# Altium PCB smart_lock.PcbDoc
Units mm, origin at the board's own origin, x right, y up, seen from the top; angles counter-clockwise.
Board outline 152.4 x 101.6 mm, 2 copper layers (Top Layer, Bottom Layer); 9 components, 14 nets, 105 pads, 0 vias.
Unrouted connection lines stored in the file: 1.
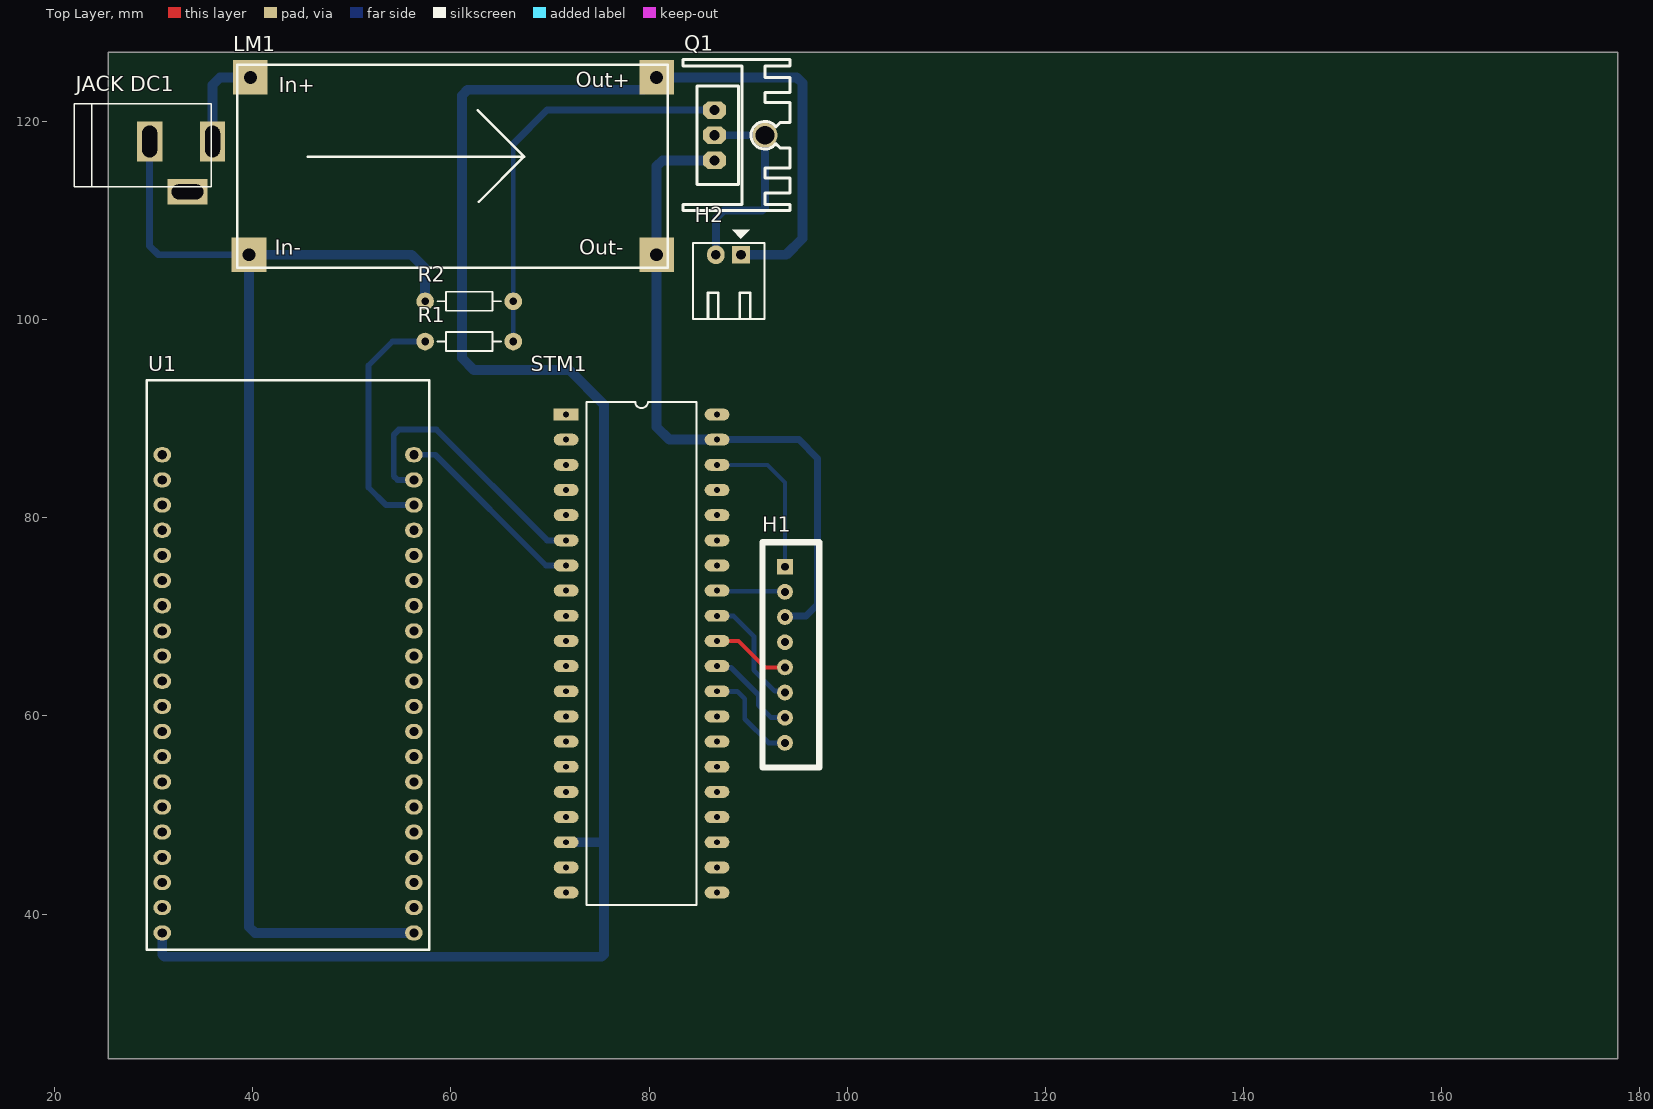
[diagram p0: Top Layer view]
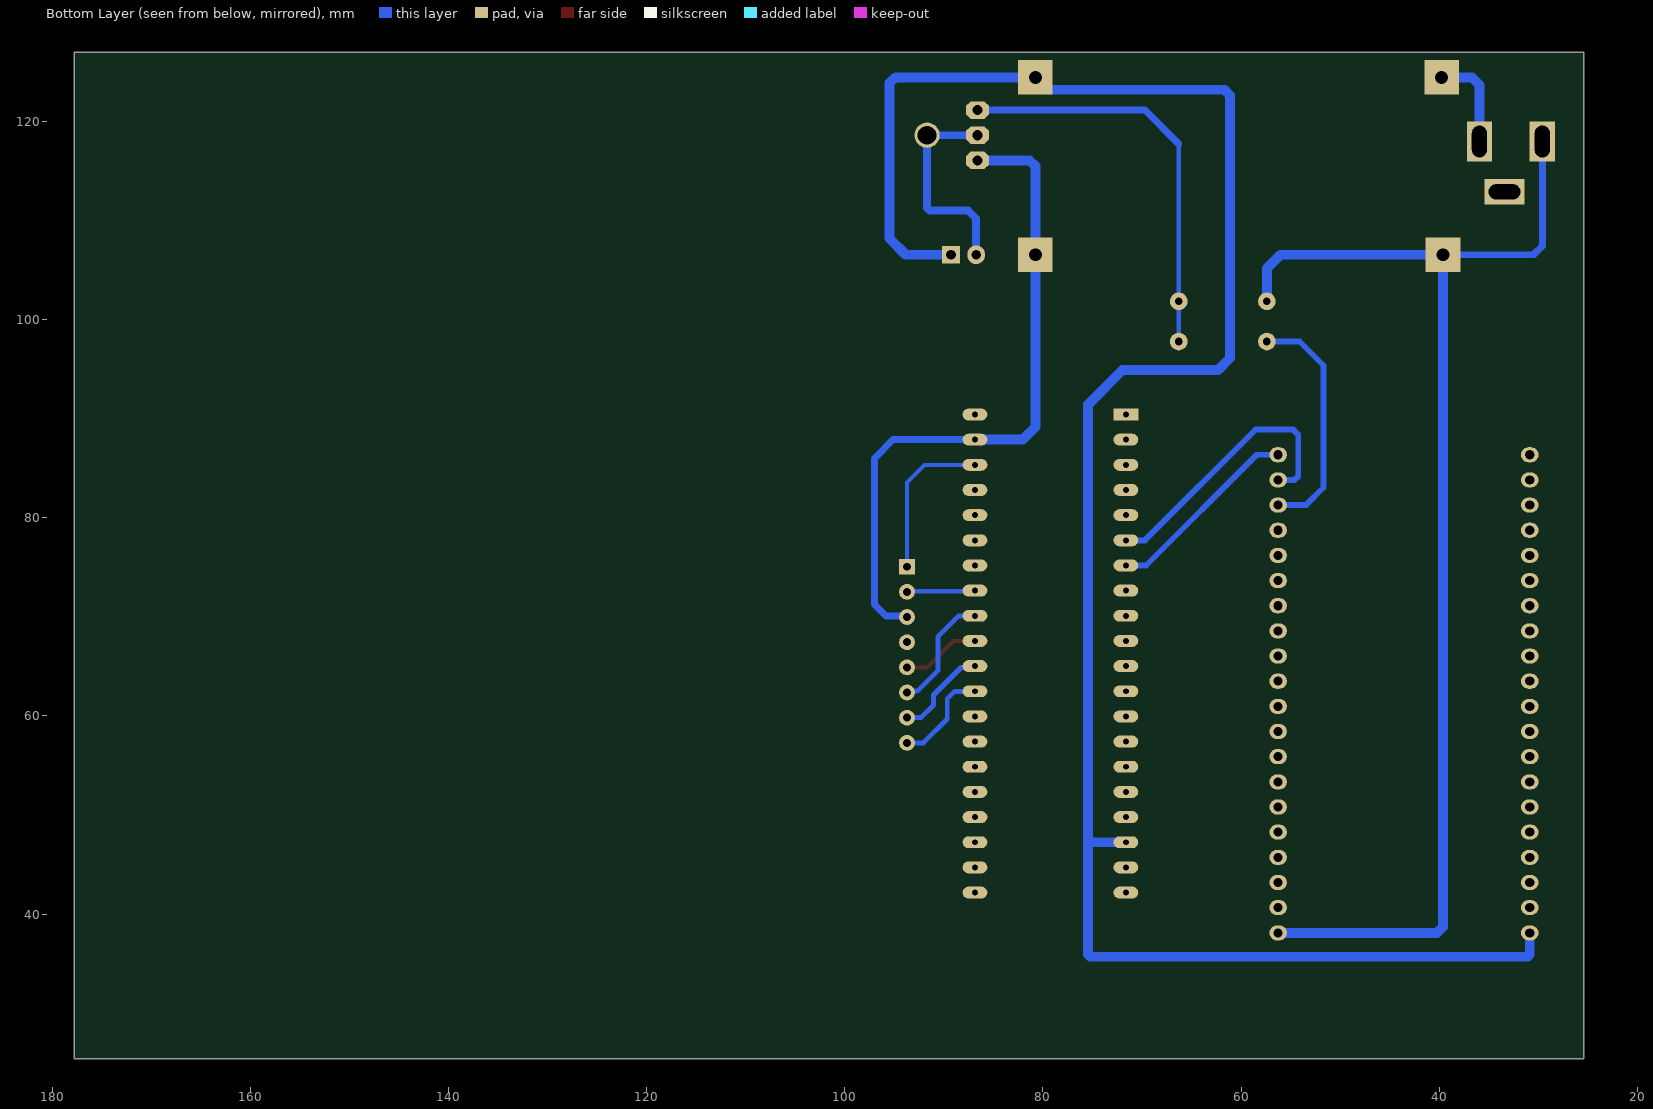
[diagram p1: Bottom Layer view, seen from below]
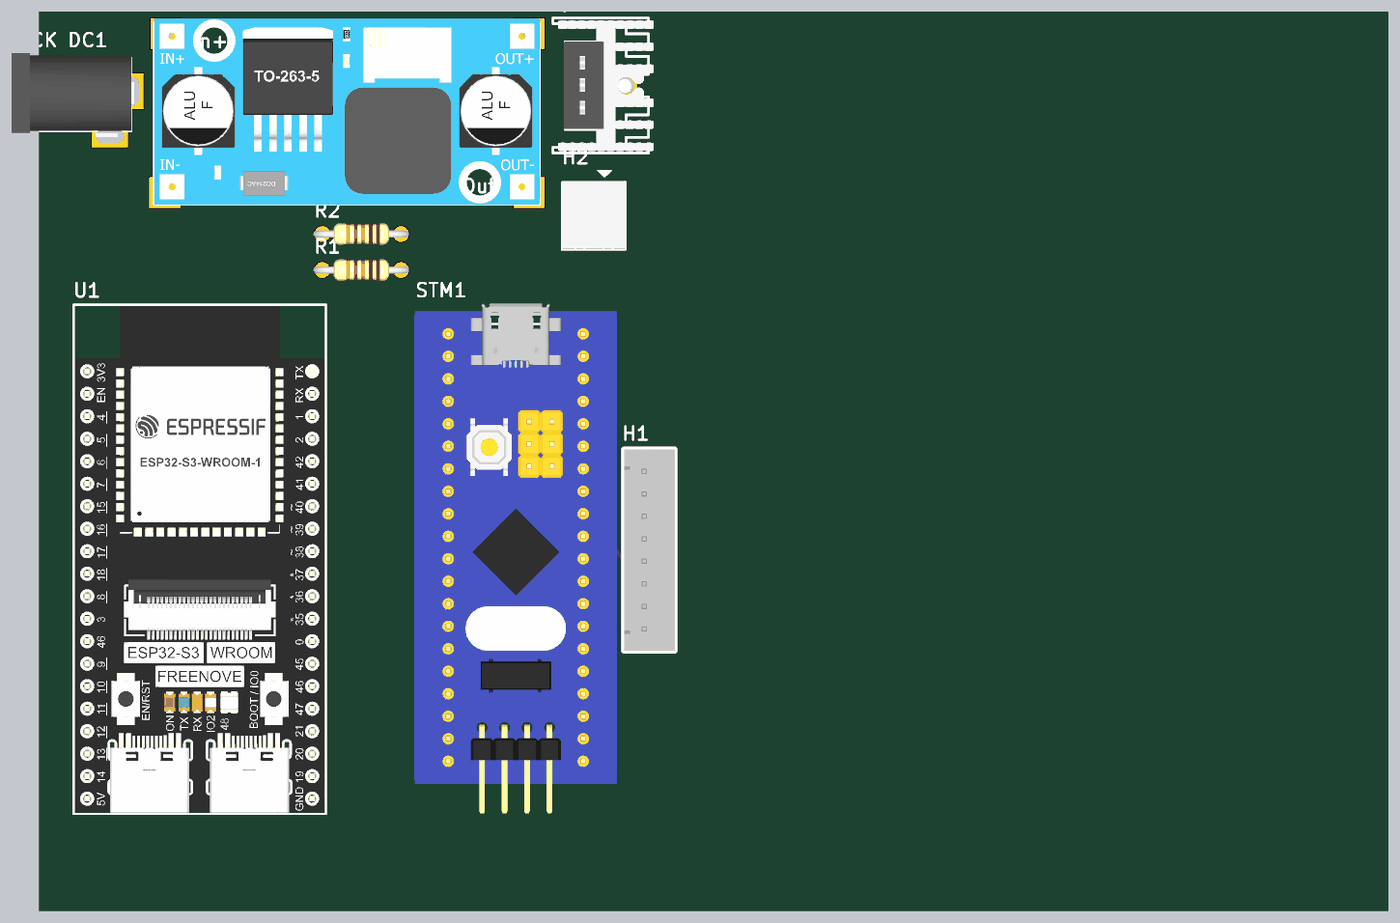
[diagram p2: 3D render of the assembled board from above, using the file's embedded part models]

## Layer stack, top to bottom
Top Solder: solder mask 0.0102, Solder Resist, Dk 3.5
Top Layer: signal copper 0.0356
Dielectric 1: dielectric 0.32, FR-4, Dk 4.8
Bottom Layer: signal copper 0.0356
Bottom Solder: solder mask 0.0102, Solder Resist, Dk 3.5

## Board outline
25.4,25.4 177.8,25.4 177.8,127 25.4,127

## Design rules (kind name [scope] priority, off if disabled: settings)
Clearance [All] p1: gap=0.4 ignorepadtopadclearanceinfootprint=FALSE
PolygonConnect [All] p1: connectstyle=Relief reliefconductorwidth=0.254 reliefentries=4 polygonreliefangle="90 Angle" airgapwidth=0.254
RoutingVias [All] p1: holewidth=0.711 width=1.27 viastyle="Through Hole" minholewidth=0.711 minwidth=1.27 maxholewidth=0.711 maxwidth=1.27
SolderMaskExpansion [All] p1: expansion=0.102 istentingtop=FALSE
SupplyNets "Schematic Supply Nets" [InNet('GND')] p1: voltage=0.000
Width [All] p1: maxlimit=1 minlimit=0.254 preferedwidth=0.5
30 further rules are at their usual default settings.

## Components (designator, comment, footprint, x,y, rotation, side; value= is the part's Value field where it differs from the comment)
H1 "Header 8P 2.54 Duc Thang" XH2.54M-8 93.726,75.057 r270 top
H2 "Header 2P 2.54 Duc Cong" "Header 2P DC 2.54" 89.281,106.553 r270 top
"JACK DC1" "JACK DC 5.5" "JACK DC 5.5" 32.766,115.443 r0 top value="Jac DC"
LM1 "LM2596-Adj" lm2596 56.261,113.411 r0 top
Q1 "IRFZ44" QTO-220H3 86.614,121.158 r270 top
R1 "100" R1/4W 57.404,97.79 r0 top value="R1/4W - 1K"
R2 "10K" R1/4W 57.404,101.854 r0 top value="R1/4W - 1K"
STM1 "KIT STM32F103C8T6" "STM32F103 KIT" 71.628,90.424 r0 top
U1 "ESP32-S3-CAM" ESP32-S3-CAM 30.861,58.42 r0 top

## Footprints (in the part's own frame and the unit in brackets; to place one, negate y for a bottom-side part, rotate by r counter-clockwise, add the part's x,y. Pads: shape width x height; smd on the part's side, far side on the other; paste and mask are expansions set on the pad)
ESP32-S3-CAM [mil] "ESP32-S3-CAM"
  oval 70x60 hole 36: 1(0,1100) 2(0,1000) 3(0,900) 4(0,800) 5(0,700) 6(0,600) 7(0,500) 8(0,400) 9(0,300) 10(0,200) 11(0,100) 12(0,0) 13(0,-100) 14(0,-200) 15(0,-300) 16(0,-400) 17(0,-500) 18(0,-600) 19(0,-700) 20(0,-800) 21(1000,-800) 22(1000,-700) 23(1000,-600) 24(1000,-500) 25(1000,-400) 26(1000,-300) 27(1000,-200) 28(1000,-100) 29(1000,0) 30(1000,100) 31(1000,200) 32(1000,300) 33(1000,400) 34(1000,500) 35(1000,600) 36(1000,700) 37(1000,800) 38(1000,900) 39(1000,1000) 40(1000,1100)
  silkscreen extent -61,-868 1061,1396, body extent -55,-862 1055,1391, height 128
"Header 2P DC 2.54" [mil]
  rect 70x70 hole 39.37 unplated: 1(0,0)
  oval 75x70 hole 39.37 unplated: 2(0,-100)
  silkscreen extent -100,-190 255,93, body extent -50,-190 250,90, height 237
"JACK DC 5.5" [mm] "Jac DC input"
  rect 2.54x4.064 hole 1.5 slot 3.2 at 90 deg: 1(3.175,2.54) 2(-3.175,2.54)
  rect 4.064x2.54 hole 1.5 slot 3.2 at 0 deg: 3(0.635,-2.54)
  silkscreen extent -10.79,-2.03 3.05,6.35, body extent -10.42,-2.67 3.4,6.84, height 11.02
lm2596 [mm]
  rect 3.5x3.5 hole 1.3: 1(-16.51,11.049) 2(-16.637,-6.858) 3(24.511,-6.858) 4(24.511,11.049)
  silkscreen extent -17.85,-8.18 25.65,12.32, body extent -17.81,-8.21 25.69,12.79, height 13.68
QTO-220H3 [mil] "TO-220 1-2-3"
  oct 70x90 hole 40: 1(0,0) 2(100,0) 3(200,0)
  round 100 hole 75: 2(100,200)
  silkscreen extent -200,-125 400,300, body extent -190,-102 392,323, height 984
R1/4W [mil] "R 1/4W, 2 Pin, 350mil"
  round 70 hole 31: 1(0,0) 2(350,0)
  silkscreen extent 48,-38 302,38, body extent -40,-47 386,47, height 111
"STM32F103 KIT" [mm]
  rect 2.5x1.2 hole 0.6: 1(0,0)
  oval 2.5x1.2 hole 0.6: 2(0,-2.54) 3(0,-5.08) 4(0,-7.62) 5(0,-10.16) 6(0,-12.7) 7(0,-15.24) 8(0,-17.78) 9(0,-20.32) 10(0,-22.86) 11(0,-25.4) 12(0,-27.94) 13(0,-30.48) 14(0,-33.02) 15(0,-35.56) 16(0,-38.1) 17(0,-40.64) 18(0,-43.18) 19(0,-45.72) 20(0,-48.26) 21(15.24,-48.26) 22(15.24,-45.72) 23(15.24,-43.18) 24(15.24,-40.64) 25(15.24,-38.1) 26(15.24,-35.56) 27(15.24,-33.02) 28(15.24,-30.48) 29(15.24,-27.94) 30(15.24,-25.4) 31(15.24,-22.86) 32(15.24,-20.32) 33(15.24,-17.78) 34(15.24,-15.24) 35(15.24,-12.7) 36(15.24,-10.16) 37(15.24,-7.62) 38(15.24,-5.08) 39(15.24,-2.54) 40(15.24,0)
  silkscreen extent 2.08,-49.53 13.16,1.27, body extent -3.81,-53.97 19.05,3.59, height 16.12
XH2.54M-8 [mm]
  rect 1.6x1.6 hole 0.8: 1(0,0)
  round 1.6 hole 0.8: 2(2.54,0) 3(5.08,0) 4(7.62,0) 5(10.16,0) 6(12.7,0) 7(15.24,0) 8(17.78,0)
  silkscreen extent -2.48,-2.26 20.26,3.46, body extent -2.48,-2.26 20.26,3.48, height 6.91

## Part data
H1 H2: "Cắm", Chung_Loai=Cắm, Don_Vi=Con
  H1: Ma_Hang=MH003366, Ten_Linh_Kien="Header 8P XH2.54-8P Đực Thẳng"
  H2: Ma_Hang=MH002852, Ten_Linh_Kien="Header 2P XH2.54-2P Đực Cong"
LM1: "Designed By @Alixahedi"
Q1: "HEXFET N-Channel Power MOSFET"
R1 R2: library part R1/4W, "Resistor 1/4W"
STM1: library part "STM32f103 Bluepill", "KIT STM32F103C8T6 Bluepill"

## Nets (pads, with @x,y where several pads share a name; then routed paths per layer and width w, separated by ;. In a path a pad name is that pad's centre, name@x,y a point inside that pad or via, vN(x,y) a via of type N, cw(c..) or ccw(c..) an arc to the next point about the centre after c; other vN are vias at no path point)
1: H2.2 Q1.2 | length 21.5
  Bottom Layer w0.5: Q1.2@92.329,118.364 Q1.2@92.392,118.3
  Bottom Layer w0.8: Q1.2@86.614,118.618 91.694,118.618 91.694,111.291 91.401,110.998 87.542,110.998 86.741,110.197 H2.2
3V3: H1.1 STM1.38 | length 16.1
  Bottom Layer w0.4: STM1.38 91.948,85.344 93.726,83.566 H1.1
5V: H2.1 LM1.4 STM1.18 U1.20 | length 207.5
  Bottom Layer w1: U1.20 30.861,35.921 31.095,35.687 75.204,35.687 75.438,35.921 75.438,47.244 ; STM1.18 75.438,47.244 ; H2.1 93.853,106.553 95.504,108.204 95.504,123.874 94.918,124.46 81.788,124.46 81.28,123.952 LM1.4 79.522,123.21 61.693,123.21 61.107,122.624 61.107,96.119 62.308,94.918 71.96,94.918 75.438,91.44 75.438,47.244
9: STM1.6 U1.39 | length 28.6
  Bottom Layer w0.6: U1.39 54.61,83.82 54.229,84.201 54.229,88.392 54.737,88.9 58.547,88.9 69.723,77.724 STM1.6
10: STM1.7 U1.40 | length 20
  Bottom Layer w0.6: U1.40 58.42,86.36 69.596,75.184 STM1.7
12V: "JACK DC1.1" LM1.1 | length 10.4
  Bottom Layer w1: 35.941,117.983 35.941,123.698 36.703,124.46 LM1.1 LM1.1@39.37,124.079
FET: R1.1 U1.38 | length 24.3
  Bottom Layer w0.6: U1.38 53.467,81.28 51.689,83.058 51.689,95.377 54.102,97.79 R1.1
GND: "JACK DC1.2" H1.3 LM1.2 LM1.3 Q1.3 R2.1 STM1.39 U1.21 | length 195.9
  Bottom Layer w0.7: 29.591,117.983 29.591,107.442 30.48,106.553 LM1.2 ; STM1.39 95.123,87.884 97.028,85.979 97.028,71.247 95.846,70.065 93.814,70.065 H1.3
  Bottom Layer w1: U1.21 40.21,38.1 39.624,38.686 LM1.2 56.007,106.553 57.404,105.156 R2.1 ; Q1.3 81.358,116.078 80.772,115.492 80.772,89.154 82.042,87.884 STM1.39
MISO: H1.5 STM1.31 | length 8
  Top Layer w0.4: STM1.31 89.027,67.564 91.694,64.897 H1.5
MOSI: H1.6 STM1.32 | length 12.1
  Bottom Layer w0.5: STM1.32 88.519,70.104 90.584,68.039 90.584,64.61 92.692,62.502 93.581,62.502 H1.6
NetQ1_1: Q1.1 R1.2 R2.2 | length 41.7
  Bottom Layer w0.5: R1.2 R2.2 66.294,117.729
  Bottom Layer w0.7: 66.294,117.729 69.723,121.158 Q1.1
RST: H1.2 STM1.33 | length 6.9
  Bottom Layer w0.5: STM1.33 86.931,72.581 93.662,72.581 H1.2
SCK: H1.7 STM1.30 | length 9.6
  Bottom Layer w0.5: STM1.30 87.007,64.885 88.277,64.885 91.059,62.103 91.059,61.087 92.329,59.817 H1.7
SDA: H1.8 STM1.29 | length 10.2
  Bottom Layer w0.5: STM1.29 88.9,62.484 89.662,61.722 89.662,59.69 92.075,57.277 H1.8
pads on no net: "JACK DC1.3" H1.4 STM1.1 STM1.2 STM1.3 STM1.4 STM1.5 STM1.8 STM1.9 STM1.10 STM1.11 STM1.12 STM1.13 STM1.14 STM1.15 STM1.16 STM1.17 STM1.19 STM1.20 STM1.21 STM1.22 STM1.23 STM1.24 STM1.25 STM1.26 STM1.27 STM1.28 STM1.34 STM1.35 STM1.36 STM1.37 STM1.40 U1.1 U1.2 U1.3 U1.4 U1.5 U1.6 U1.7 U1.8 U1.9 U1.10 U1.11 U1.12 U1.13 U1.14 U1.15 U1.16 U1.17 U1.18 U1.19 U1.22 U1.23 U1.24 U1.25 U1.26 U1.27 U1.28 U1.29 U1.30 U1.31 U1.32 U1.33 U1.34 U1.35 U1.36 U1.37

## Text inside footprints (layer, text, board x,y; h text height)
LM1: Top Overlay "Out+" at 72.593,123.444 h1.52; Top Overlay "Out-" at 72.974,106.553 h1.52; Top Overlay "In-" at 42.24,106.553 h1.52; Top Overlay "In+" at 42.621,122.936 h1.52